# Altium PCB RF315Mhz.PcbDoc (part 2 of 2)
Units mm, origin at the board's own origin, x right, y up, seen from the top; angles counter-clockwise.
Board outline 104 x 96 mm, 2 copper layers (Top Layer, Bottom Layer); 125 components, 20 nets, 503 pads, 66 vias.
Unrouted connection lines stored in the file: 1.
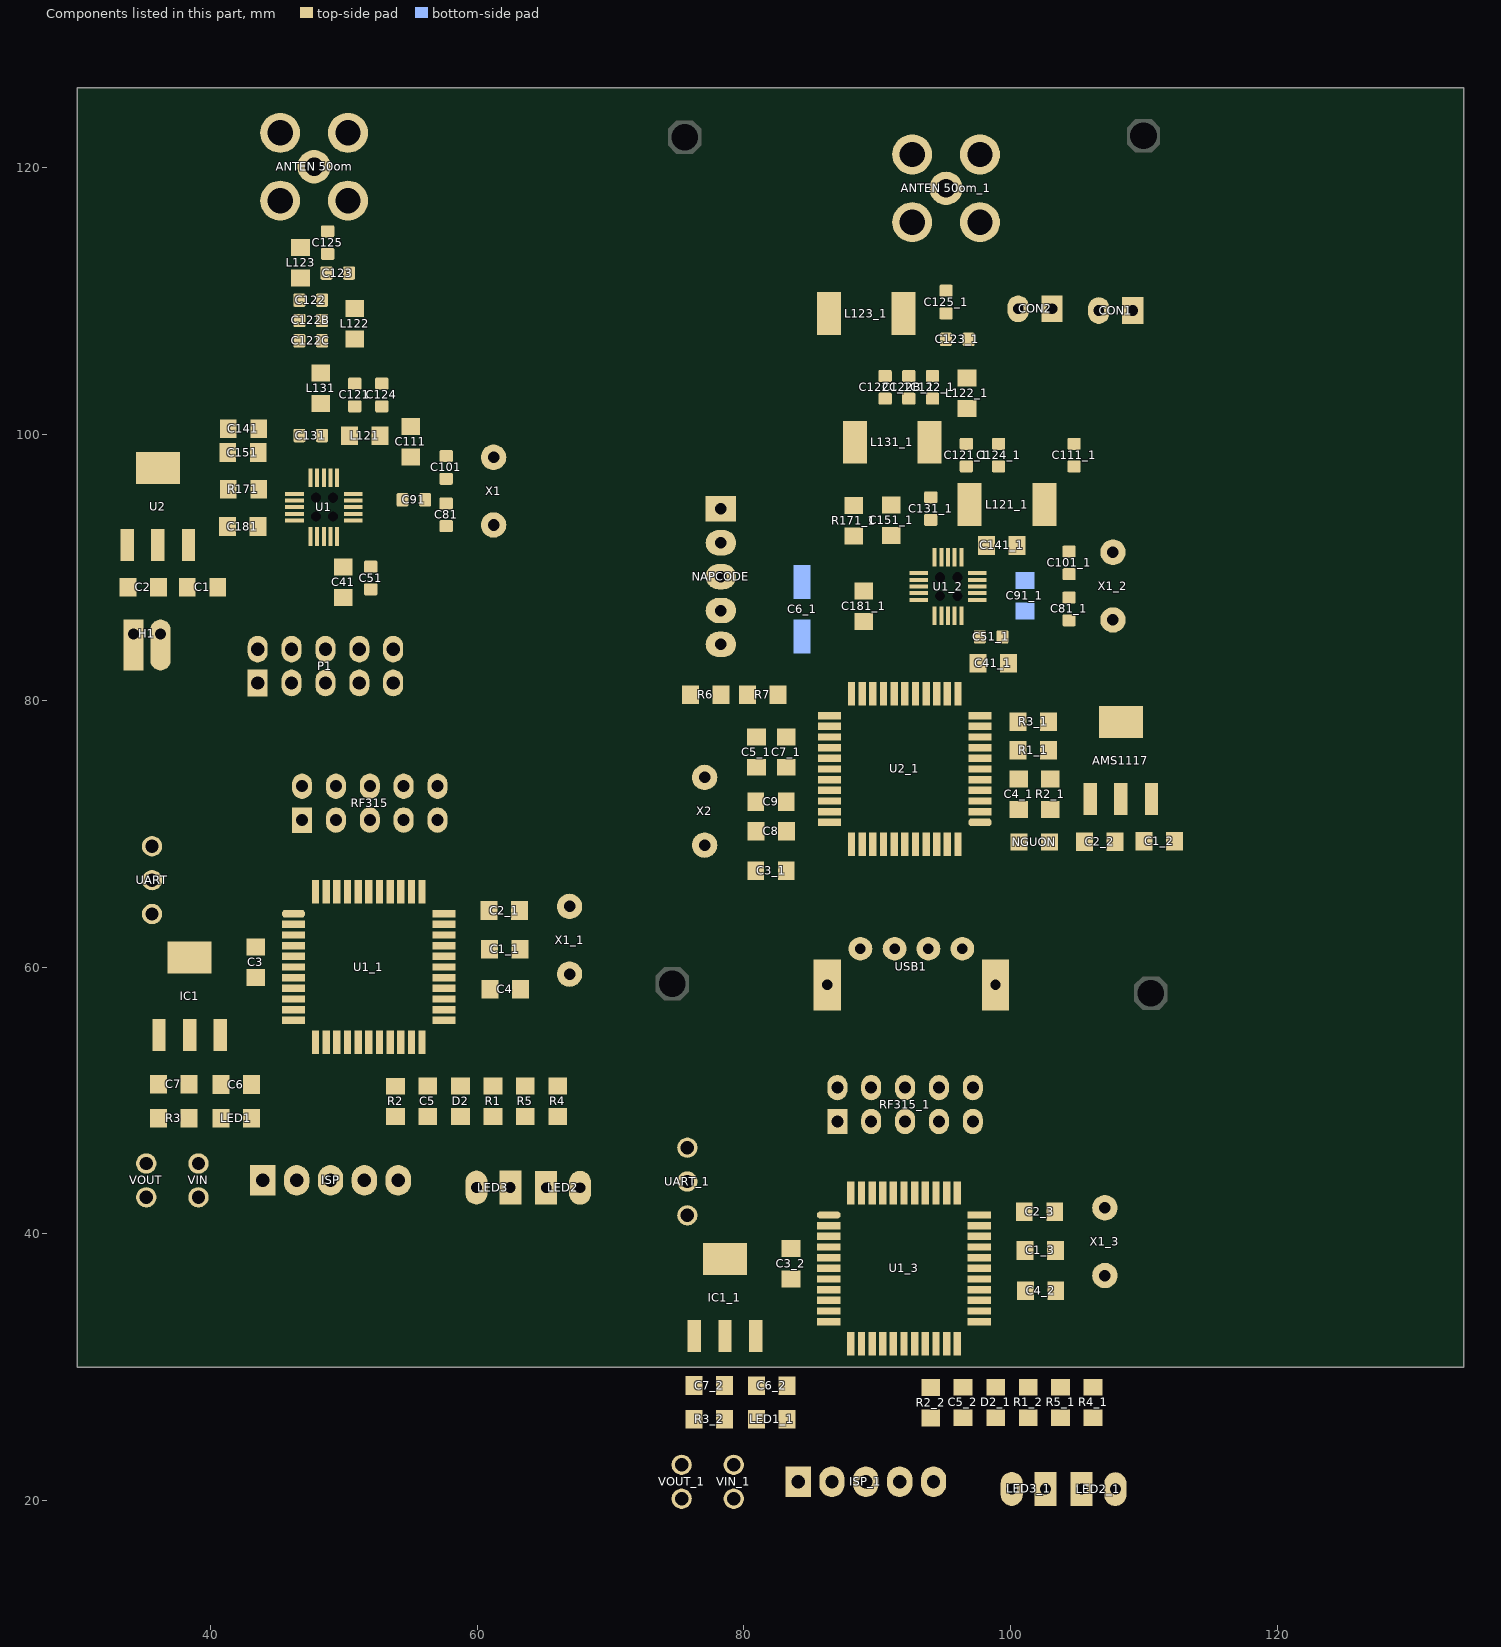
[diagram p2: the components of this part, seen from the top]

## Via types
v1: diameter 1.27, hole 0.711, Top Layer to Bottom Layer, 52 vias
v2: diameter 1, hole 0.7, Top Layer to Bottom Layer, 5 vias
v3: diameter 1.1, hole 0.7, Top Layer to Bottom Layer, 3 vias
v4: diameter 1.1, hole 0.711, Top Layer to Bottom Layer, 2 vias
v5: diameter 1, hole 0.6, Top Layer to Bottom Layer, 2 vias
v6: diameter 1.143, hole 0.711, Top Layer to Bottom Layer, 1 vias
v7: diameter 1, hole 0.711, Top Layer to Bottom Layer, 1 vias

## Nets (pads, with @x,y where several pads share a name; then routed paths per layer and width w, separated by ;. In a path a pad name is that pad's centre, name@x,y a point inside that pad or via, vN(x,y) a via of type N, cw(c..) or ccw(c..) an arc to the next point about the centre after c; other vN are vias at no path point) (continued)
copper on no net: | length 1810
  Top Layer w0.025: 57.545,118.276 57.622,118.276 ; 57.545,118.302 57.622,118.302 ; 57.545,118.327 57.622,118.327 ; 57.545,118.352 57.622,118.352 ; 57.545,118.378 57.622,118.378 ; 57.545,118.403 57.622,118.403 ; 57.545,118.429 57.622,118.429 ; 57.545,118.454 57.622,118.454 ; 57.545,118.479 57.622,118.479 ; 57.545,118.505 57.622,118.505 ; 57.545,118.53 57.622,118.53 ; 57.545,118.556 57.622,118.556 ; 57.545,118.581 57.622,118.581 ; 57.545,118.606 57.622,118.606 ; 57.545,118.632 57.622,118.632 ; 57.545,118.657 57.622,118.657 ; 57.545,118.683 57.622,118.683 ; 57.545,118.708 57.622,118.708 ; 57.545,118.733 57.622,118.733 ; 57.545,118.759 57.622,118.759 ; 57.545,118.784 57.622,118.784 ; 57.545,118.81 57.622,118.81 ; 57.545,118.835 57.622,118.835 ; 57.545,118.86 57.622,118.86 ; 57.545,118.886 57.622,118.886 ; 57.545,118.911 57.622,118.911 ; 57.545,118.937 57.622,118.937 ; 57.545,118.962 57.622,118.962 ; 57.545,118.987 57.622,118.987 ; 57.545,119.013 57.622,119.013 ; 57.545,119.038 57.622,119.038 ; 57.545,119.064 57.622,119.064 ; 57.545,119.089 57.622,119.089 ; 57.545,119.114 57.622,119.114 ; 57.545,119.14 57.622,119.14 ; 57.545,119.165 57.622,119.165 ; 57.545,119.191 57.622,119.191 ; 57.545,119.216 57.622,119.216 ; 57.545,119.241 57.622,119.241 ; 57.545,119.267 57.622,119.267 ; 57.545,119.292 57.622,119.292 ; 57.545,119.318 57.622,119.318 ; 57.545,119.343 57.622,119.343 ; 57.545,119.368 57.622,119.368 ; 57.545,119.394 57.622,119.394 ; 57.545,119.419 57.622,119.419 ; 57.545,119.445 57.622,119.445 ; 57.545,119.47 57.622,119.47 ; 57.545,119.495 57.622,119.495 ; 57.545,119.521 57.622,119.521 ; 57.545,119.546 57.622,119.546 ; 57.545,119.572 57.622,119.572 ; 57.545,119.597 57.622,119.597 ; 57.545,119.622 57.622,119.622 ; 57.545,119.648 57.622,119.648 ; 57.545,119.673 57.622,119.673 ; 57.545,119.699 57.622,119.699 ; 57.545,119.724 57.622,119.724 ; 57.545,119.749 57.622,119.749 ; 57.545,119.775 57.622,119.775 ; 57.545,119.8 57.622,119.8 ; 57.545,119.826 57.622,119.826 ; 57.545,119.851 57.622,119.851 ; 57.545,119.876 57.622,119.876 ; 57.545,119.902 57.622,119.902 ; 57.545,119.927 57.622,119.927 ; 57.545,119.953 57.622,119.953 ; 57.545,119.978 57.622,119.978 ; 57.545,120.003 57.622,120.003 ; 57.545,120.029 57.622,120.029 ; 57.545,120.054 57.622,120.054 ; 57.545,120.08 57.622,120.08 ; 57.545,120.105 57.622,120.105 ; 57.545,120.13 57.622,120.13 ; 57.545,120.156 57.622,120.156 ; 57.545,120.181 57.622,120.181 ; 57.545,120.207 57.622,120.207 ; 57.545,120.232 57.622,120.232 ; 57.545,120.257 57.622,120.257 ; 57.545,120.283 57.622,120.283 ; 57.545,120.308 57.622,120.308 ; 57.545,120.334 57.622,120.334 ; 57.545,120.359 57.622,120.359 ; 57.545,120.384 57.622,120.384 ; 57.545,120.41 57.622,120.41 ; 57.545,120.435 57.622,120.435 ; 57.545,120.461 57.622,120.461 ; 57.545,120.486 57.622,120.486 ; 57.545,120.511 57.622,120.511 ; 57.545,120.537 57.622,120.537 ; 57.545,120.562 57.622,120.562 ; 57.545,120.588 57.622,120.588 ; 57.545,120.613 57.622,120.613 ; 57.545,120.638 57.622,120.638 ; 57.545,120.664 57.622,120.664 ; 57.545,120.689 57.622,120.689 ; 57.545,120.715 57.622,120.715 ; 57.545,120.74 57.622,120.74 ; 57.545,120.765 57.622,120.765 ; 57.545,120.791 57.622,120.791 ; 57.545,120.816 57.622,120.816 ; 57.545,120.842 57.622,120.842 ; 57.545,120.867 57.622,120.867 ; 57.545,120.892 57.622,120.892 ; 57.545,120.918 57.622,120.918 ; 57.545,120.943 57.622,120.943 ; 57.545,120.969 57.622,120.969 ; 57.545,120.994 57.622,120.994 ; 57.545,121.019 57.622,121.019 ; 57.545,121.045 57.622,121.045 ; 57.545,121.07 57.622,121.07 ; 57.545,121.096 57.622,121.096 ; 57.545,121.121 57.622,121.121 ; 57.545,121.146 57.622,121.146 ; 57.545,121.172 57.622,121.172 ; 57.545,121.197 57.622,121.197 ; 57.545,121.223 57.622,121.223 ; 57.545,121.248 57.622,121.248 ; 57.545,121.273 57.622,121.273 ; 57.545,121.299 57.622,121.299 ; 57.545,121.324 57.622,121.324 ; 57.545,121.35 57.622,121.35 ; 57.545,121.375 57.622,121.375 ; 57.545,121.4 57.622,121.4 ; 57.545,121.426 57.622,121.426 ; 57.545,121.451 57.622,121.451 ; 57.545,121.477 57.622,121.477 ; 57.545,121.502 57.622,121.502 ; 57.545,121.527 57.622,121.527 ; 57.545,121.553 57.622,121.553 ; 57.545,121.578 57.622,121.578 ; 57.545,121.604 57.622,121.604 ; 57.545,121.629 57.622,121.629 ; 57.545,121.654 57.622,121.654 ; 57.545,121.68 57.622,121.68 ; 57.545,121.705 57.622,121.705 ; 57.545,121.731 57.622,121.731 ; 57.545,121.756 57.622,121.756 ; 57.545,121.781 57.622,121.781 ; 57.545,121.807 57.622,121.807 ; 57.545,121.832 57.622,121.832 ; 57.545,121.858 57.622,121.858 ; 57.545,121.883 57.622,121.883 ; 57.545,121.908 57.622,121.908 ; 57.545,121.934 57.622,121.934 ; 57.545,121.959 57.622,121.959 ; 57.545,121.985 57.647,121.985 ; 57.571,118.175 57.672,118.175 ; 57.571,118.2 57.647,118.2 ; 57.571,118.225 57.647,118.225 ; 57.571,118.251 57.647,118.251 ; 57.571,122.01 57.647,122.01 ; 57.571,122.035 57.647,122.035 ; 57.571,122.061 57.672,122.061 ; 57.596,118.124 57.672,118.124 ; 57.596,118.149 57.672,118.149 ; 57.596,122.086 57.672,122.086 ; 57.596,122.112 57.672,122.112 ; 57.596,122.137 57.698,122.137 ; 57.622,118.073 57.698,118.073 ; 57.622,118.098 57.698,118.098 ; 57.622,122.162 57.698,122.162 ; 57.622,122.188 57.723,122.188 ; 57.647,118.022 57.749,118.022 ; 57.647,118.048 57.723,118.048 ; 57.647,122.213 57.723,122.213 ; 57.647,122.239 57.749,122.239 ; 57.672,117.971 57.774,117.971 ; 57.672,117.997 57.749,117.997 ; 57.672,122.264 57.774,122.264 ; 57.698,117.946 57.799,117.946 ; 57.698,122.289 57.799,122.289 ; 57.698,122.315 57.799,122.315 ; 57.723,117.895 57.825,117.895 ; 57.723,117.921 57.825,117.921 ; 57.723,122.34 57.825,122.34 ; 57.749,117.87 57.85,117.87 ; 57.749,122.366 57.85,122.366 ; 57.774,117.844 57.901,117.844 ; 57.774,122.391 57.876,122.391 ; 57.799,117.819 57.926,117.819 ; 57.799,122.416 57.926,122.416 ; 57.825,117.794 57.952,117.794 ; 57.825,122.442 57.952,122.442 ; 57.85,122.467 57.977,122.467 ; 57.876,117.768 58.003,117.768 ; 57.876,122.493 58.028,122.493 ; 57.901,117.743 58.028,117.743 ; 57.926,117.717 58.104,117.717 ; 57.926,122.518 58.079,122.518 ; 57.952,122.543 58.155,122.543 ; 57.977,117.692 58.155,117.692 ; 57.977,121.908 58.536,121.908 ; 57.977,121.934 58.511,121.934 ; 57.977,121.959 58.485,121.959 ; 57.977,121.985 58.485,121.985 ; 57.977,122.01 58.485,122.01 ; 57.977,122.035 58.485,122.035 ; 57.977,122.061 58.46,122.061 ; 58.003,121.858 58.587,121.858 ; 58.003,121.883 58.561,121.883 ; 58.003,122.086 58.46,122.086 ; 58.003,122.112 58.434,122.112 ; 58.003,122.569 58.231,122.569 ; 58.028,117.667 58.257,117.667 ; 58.028,121.807 58.638,121.807 ; 58.028,121.832 58.612,121.832 ; 58.028,122.137 58.434,122.137 ; 58.053,118.098 58.13,118.098 ; 58.053,118.124 58.282,118.124 ; 58.053,118.149 58.434,118.149 ; 58.053,118.175 58.587,118.175 ; 58.053,118.2 58.612,118.2 ; 58.053,121.781 58.663,121.781 ; 58.053,122.162 58.409,122.162 ; 58.053,122.594 62.092,122.594 ; 58.079,117.641 62.092,117.641 ; 58.079,118.225 58.638,118.225 ; 58.079,118.251 58.663,118.251 ; 58.079,118.276 58.688,118.276 ; 58.079,118.302 58.714,118.302 ; 58.079,118.327 58.739,118.327 ; 58.079,118.352 58.765,118.352 ; 58.079,122.188 58.358,122.188 ; 58.104,118.378 58.79,118.378 ; 58.104,118.403 58.815,118.403 ; 58.104,118.429 58.841,118.429 ; 58.104,118.454 58.866,118.454 ; 58.104,118.479 58.892,118.479 ; 58.104,118.505 58.917,118.505 ; 58.104,121.756 58.688,121.756 ; 58.13,118.53 58.942,118.53 ; 58.13,118.556 58.968,118.556 ; 58.13,118.581 58.993,118.581 ; 58.13,118.606 59.019,118.606 ; 58.13,122.213 58.307,122.213 ; 58.13,122.62 62.041,122.62 ; 58.155,117.616 62.016,117.616 ; 58.155,118.632 59.044,118.632 ; 58.155,121.731 58.714,121.731 ; 58.18,118.657 59.069,118.657 ; 58.206,118.683 59.095,118.683 ; 58.206,122.645 61.94,122.645 ; 58.231,117.59 61.914,117.59 ; 58.231,118.708 59.12,118.708 ; 58.231,120.486 58.282,120.486 ; 58.257,118.733 59.146,118.733 ; 58.257,120.511 58.358,120.511 ; 58.257,121.705 58.739,121.705 ; 58.282,118.759 59.171,118.759 ; 58.282,120.537 58.434,120.537 ; 58.282,121.68 58.765,121.68 ; 58.307,118.784 59.196,118.784 ; 58.307,120.562 58.511,120.562 ; 58.307,121.654 58.79,121.654 ; 58.333,118.81 59.222,118.81 ; 58.333,120.588 58.587,120.588 ; 58.333,121.629 58.815,121.629 ; 58.358,118.835 59.247,118.835 ; 58.358,120.613 58.638,120.613 ; 58.358,121.604 58.841,121.604 ; 58.384,118.86 59.273,118.86 ; 58.384,120.638 58.714,120.638 ; 58.384,121.578 58.866,121.578 ; 58.409,118.886 59.298,118.886 ; 58.409,120.664 58.79,120.664 ; 58.409,121.553 58.892,121.553 ; 58.434,118.911 59.323,118.911 ; 58.434,120.689 58.815,120.689 ; 58.434,121.527 58.917,121.527 ; 58.46,118.937 59.349,118.937 ; 58.46,120.715 58.841,120.715 ; 58.46,121.502 58.942,121.502 ; 58.485,118.962 59.374,118.962 ; 58.485,120.74 58.866,120.74 ; 58.485,121.477 58.968,121.477 ; 58.511,118.987 59.4,118.987 ; 58.511,120.765 58.892,120.765 ; 58.511,121.451 58.993,121.451 ; 58.536,119.013 59.425,119.013 ; 58.536,120.791 58.917,120.791 ; 58.536,121.426 59.019,121.426 ; 58.561,119.038 59.45,119.038 ; 58.561,120.816 59.831,120.816 ; 58.561,121.4 59.044,121.4 ; 58.587,119.064 59.476,119.064 ; 58.587,120.842 59.806,120.842 ; 58.587,121.375 59.069,121.375 ; 58.612,119.089 59.501,119.089 ; 58.612,120.867 59.781,120.867 ; 58.612,121.35 59.476,121.35 ; 58.638,119.114 59.527,119.114 ; 58.638,120.892 59.755,120.892 ; 58.638,121.324 59.45,121.324 ; 58.663,119.14 59.552,119.14 ; 58.663,120.918 59.73,120.918 ; 58.663,121.299 59.425,121.299 ; 58.688,119.165 59.577,119.165 ; 58.688,120.943 59.704,120.943 ; 58.688,121.273 59.4,121.273 ; 58.714,119.191 59.603,119.191 ; 58.714,120.969 59.679,120.969 ; 58.714,121.248 59.4,121.248 ; 58.739,119.216 59.628,119.216 ; 58.739,120.994 59.654,120.994 ; 58.739,121.223 59.425,121.223 ; 58.765,119.241 59.654,119.241 ; 58.765,121.019 59.628,121.019 ; 58.765,121.197 59.45,121.197 ; 58.79,119.267 59.679,119.267 ; 58.79,121.045 59.603,121.045 ; 58.79,121.172 59.476,121.172 ; 58.815,119.292 59.704,119.292 ; 58.815,121.07 59.577,121.07 ; 58.815,121.146 59.501,121.146 ; 58.841,119.318 59.73,119.318 ; 58.841,121.096 59.552,121.096 ; 58.841,121.121 59.527,121.121 ; 58.866,119.343 59.755,119.343 ; 58.892,119.368 59.781,119.368 ; 58.917,119.394 59.806,119.394 ; 58.942,119.419 59.831,119.419 ; 58.968,119.445 59.857,119.445 ; 58.968,120.791 59.857,120.791 ; 58.993,119.47 59.882,119.47 ; 58.993,120.765 59.882,120.765 ; 59.019,119.495 59.908,119.495 ; 59.019,120.74 59.908,120.74 ; 59.044,119.521 59.933,119.521 ; 59.044,120.715 59.933,120.715 ; 59.069,119.546 59.958,119.546 ; 59.069,120.689 59.958,120.689 ; 59.095,119.572 59.984,119.572 ; 59.095,120.664 59.984,120.664 ; 59.12,119.597 60.009,119.597 ; 59.12,120.638 60.009,120.638 ; 59.12,121.375 59.501,121.375 ; 59.146,119.622 60.035,119.622 ; 59.146,120.613 60.035,120.613 ; 59.146,121.4 59.527,121.4 ; 59.171,119.648 60.06,119.648 ; 59.171,120.588 60.06,120.588 ; 59.171,121.426 59.552,121.426 ; 59.196,119.673 60.974,119.673 ; 59.196,120.562 60.974,120.562 ; 59.196,121.451 59.552,121.451 ; 59.222,119.699 60.949,119.699 ; 59.222,120.537 60.949,120.537 ; 59.222,121.477 59.552,121.477 ; 59.247,119.724 60.924,119.724 ; 59.247,120.511 60.924,120.511 ; 59.247,121.502 59.577,121.502 ; 59.273,119.749 60.898,119.749 ; 59.273,120.486 60.898,120.486 ; 59.273,121.527 59.577,121.527 ; 59.298,119.775 60.873,119.775 ; 59.298,120.461 60.873,120.461 ; 59.298,121.553 59.577,121.553 ; 59.323,119.8 60.847,119.8 ; 59.323,120.435 60.847,120.435 ; 59.323,121.578 59.603,121.578 ; 59.349,119.826 60.822,119.826 ; 59.349,120.41 60.822,120.41 ; 59.349,121.604 59.603,121.604 ; 59.374,119.851 60.797,119.851 ; 59.374,120.384 60.797,120.384 ; 59.374,121.629 59.628,121.629 ; 59.4,119.876 60.771,119.876 ; 59.4,120.359 60.771,120.359 ; 59.4,121.654 59.628,121.654 ; 59.425,119.902 60.746,119.902 ; 59.425,120.334 60.746,120.334 ; 59.425,121.68 59.628,121.68 ; 59.45,119.927 60.72,119.927 ; 59.45,120.308 60.72,120.308 ; 59.45,121.705 59.654,121.705 ; 59.476,119.953 60.695,119.953 ; 59.476,120.283 60.695,120.283 ; 59.476,121.731 59.654,121.731 ; 59.501,119.978 60.67,119.978 ; 59.501,120.257 60.67,120.257 ; 59.501,121.756 59.654,121.756 ; 59.527,120.003 60.644,120.003 ; 59.527,120.232 60.644,120.232 ; 59.527,121.781 59.679,121.781 ; 59.552,120.029 60.619,120.029 ; 59.552,120.207 60.619,120.207 ; 59.552,121.807 59.679,121.807 ; 59.577,120.054 60.593,120.054 ; 59.577,120.181 60.593,120.181 ; 59.577,121.832 59.679,121.832 ; 59.603,120.08 60.568,120.08 ; 59.603,120.156 60.568,120.156 ; 59.603,121.858 59.704,121.858 ; 59.628,120.105 60.543,120.105 ; 59.628,120.13 60.543,120.13 ; 59.628,121.883 59.704,121.883 ; 59.654,121.908 59.704,121.908 ; 59.679,121.934 59.73,121.934 ; 59.704,121.959 59.73,121.959 ; 60.111,119.648 61,119.648 ; 60.111,120.588 61,120.588 ; 60.136,119.622 61.025,119.622 ; 60.136,120.613 61.025,120.613 ; 60.162,119.597 61.051,119.597 ; 60.162,120.638 61.051,120.638 ; 60.187,119.572 61.076,119.572 ; 60.187,120.664 61.076,120.664 ; 60.212,119.546 61.101,119.546 ; 60.212,120.689 61.101,120.689 ; 60.238,119.521 61.127,119.521 ; 60.238,120.715 61.127,120.715 ; 60.263,119.495 61.152,119.495 ; 60.263,120.74 61.152,120.74 ; 60.289,119.47 61.178,119.47 ; 60.289,120.765 61.178,120.765 ; 60.314,119.445 61.203,119.445 ; 60.314,120.791 61.203,120.791 ; 60.339,119.419 61.228,119.419 ; 60.339,120.816 61.609,120.816 ; 60.365,119.394 61.254,119.394 ; 60.365,120.842 61.584,120.842 ; 60.39,119.368 61.279,119.368 ; 60.39,120.867 61.559,120.867 ; 60.416,119.343 61.305,119.343 ; 60.416,120.892 61.533,120.892 ; 60.441,119.318 61.33,119.318 ; 60.441,120.918 61.508,120.918 ; 60.441,121.908 60.517,121.908 ; 60.441,121.934 60.492,121.934 ; 60.441,121.959 60.466,121.959 ; 60.466,119.292 61.355,119.292 ; 60.466,120.943 61.482,120.943 ; 60.466,121.858 60.568,121.858 ; 60.466,121.883 60.543,121.883 ; 60.492,119.267 61.381,119.267 ; 60.492,120.969 61.457,120.969 ; 60.492,121.781 60.644,121.781 ; 60.492,121.807 60.619,121.807 ; 60.492,121.832 60.593,121.832 ; 60.517,119.241 61.406,119.241 ; 60.517,120.994 61.432,120.994 ; 60.517,121.705 60.72,121.705 ; 60.517,121.731 60.695,121.731 ; 60.517,121.756 60.67,121.756 ; 60.543,119.216 61.432,119.216 ; 60.543,121.019 61.406,121.019 ; 60.543,121.629 60.797,121.629 ; 60.543,121.654 60.771,121.654 ; 60.543,121.68 60.746,121.68 ; 60.568,119.191 61.457,119.191 ; 60.568,121.045 61.381,121.045 ; 60.568,121.553 60.873,121.553 ; 60.568,121.578 60.847,121.578 ; 60.568,121.604 60.822,121.604 ; 60.593,119.165 61.482,119.165 ; 60.593,121.07 61.355,121.07 ; 60.593,121.477 60.949,121.477 ; 60.593,121.502 60.924,121.502 ; 60.593,121.527 60.898,121.527 ; 60.619,119.14 61.508,119.14 ; 60.619,121.096 61.33,121.096 ; 60.619,121.4 61.025,121.4 ; 60.619,121.426 61,121.426 ; 60.619,121.451 60.974,121.451 ; 60.644,119.114 61.533,119.114 ; 60.644,121.121 61.33,121.121 ; 60.644,121.375 61.051,121.375 ; 60.67,119.089 61.559,119.089 ; 60.67,121.146 61.355,121.146 ; 60.67,121.35 61.559,121.35 ; 60.695,119.064 61.584,119.064 ; 60.695,121.172 61.381,121.172 ; 60.695,121.324 61.533,121.324 ; 60.72,119.038 61.609,119.038 ; 60.72,121.197 61.406,121.197 ; 60.72,121.299 61.508,121.299 ; 60.746,119.013 61.635,119.013 ; 60.746,121.223 61.432,121.223 ; 60.746,121.273 61.482,121.273 ; 60.771,118.987 61.66,118.987 ; 60.771,121.248 61.457,121.248 ; 60.797,118.962 61.686,118.962 ; 60.822,118.937 61.711,118.937 ; 60.847,118.911 61.736,118.911 ; 60.873,118.886 61.762,118.886 ; 60.898,118.86 61.787,118.86 ; 60.924,118.835 61.813,118.835 ; 60.949,118.81 61.838,118.81 ; 60.974,118.784 61.863,118.784 ; 61,118.759 61.889,118.759 ; 61.025,118.733 61.914,118.733 ; 61.051,118.708 61.94,118.708 ; 61.076,118.683 61.965,118.683 ; 61.101,118.657 61.99,118.657 ; 61.101,121.375 61.584,121.375 ; 61.127,118.632 62.016,118.632 ; 61.127,121.4 61.609,121.4 ; 61.152,118.606 62.041,118.606 ; 61.152,121.426 61.635,121.426 ; 61.178,118.581 62.041,118.581 ; 61.178,121.451 61.66,121.451 ; 61.203,118.556 62.041,118.556 ; 61.203,121.477 61.686,121.477 ; 61.228,118.53 62.041,118.53 ; 61.228,120.791 61.635,120.791 ; 61.228,121.502 61.711,121.502 ; 61.254,118.505 62.041,118.505 ; 61.254,120.765 61.66,120.765 ; 61.254,121.527 61.736,121.527 ; 61.279,118.479 62.067,118.479 ; 61.279,120.74 61.686,120.74 ; 61.279,121.553 61.762,121.553 ; 61.305,118.454 62.067,118.454 ; 61.305,120.715 61.711,120.715 ; 61.305,121.578 61.787,121.578 ; 61.33,118.429 62.067,118.429 ; 61.33,120.689 61.736,120.689 ; 61.33,121.604 61.813,121.604 ; 61.355,118.403 62.067,118.403 ; 61.355,121.629 61.838,121.629 ; 61.381,118.378 62.067,118.378 ; 61.381,120.664 61.762,120.664 ; 61.381,121.654 61.863,121.654 ; 61.406,118.352 62.067,118.352 ; 61.406,121.68 61.889,121.68 ; 61.432,118.327 62.092,118.327 ; 61.432,120.638 61.787,120.638 ; 61.432,121.705 61.914,121.705 ; 61.457,118.302 62.092,118.302 ; 61.457,121.731 62.016,121.731 ; 61.482,118.276 62.092,118.276 ; 61.482,121.756 62.067,121.756 ; 61.508,118.251 62.092,118.251 ; 61.508,120.613 61.813,120.613 ; 61.508,121.781 62.092,121.781 ; 61.533,118.225 62.092,118.225 ; 61.533,121.807 62.117,121.807 ; 61.559,118.2 62.092,118.2 ; 61.559,121.832 62.143,121.832 ; 61.584,118.175 62.117,118.175 ; 61.584,120.588 61.838,120.588 ; 61.584,121.858 62.168,121.858 ; 61.609,121.883 62.168,121.883 ; 61.635,121.908 62.194,121.908 ; 61.66,120.562 61.863,120.562 ; 61.66,121.934 62.194,121.934 ; 61.686,121.959 62.194,121.959 ; 61.686,121.985 62.194,121.985 ; 61.686,122.01 62.194,122.01 ; 61.686,122.035 62.194,122.035 ; 61.686,122.061 62.168,122.061 ; 61.711,118.149 62.117,118.149 ; 61.711,122.086 62.168,122.086 ; 61.711,122.112 62.143,122.112 ; 61.736,120.537 61.889,120.537 ; 61.736,122.137 62.143,122.137 ; 61.762,122.162 62.117,122.162 ; 61.787,122.188 62.067,122.188 ; 61.813,120.511 61.914,120.511 ; 61.838,122.213 62.016,122.213 ; 61.863,118.124 62.117,118.124 ; 61.889,120.486 61.914,120.486 ; 61.914,117.667 62.143,117.667 ; 61.94,122.569 62.168,122.569 ; 62.016,117.692 62.194,117.692 ; 62.016,118.098 62.117,118.098 ; 62.016,122.543 62.194,122.543 ; 62.067,117.717 62.244,117.717 ; 62.092,122.518 62.244,122.518 ; 62.117,117.743 62.27,117.743 ; 62.143,122.493 62.27,122.493 ; 62.168,117.768 62.295,117.768 ; 62.168,122.467 62.321,122.467 ; 62.219,117.794 62.321,117.794 ; 62.219,122.442 62.346,122.442 ; 62.244,117.819 62.371,117.819 ; 62.244,122.416 62.371,122.416 ; 62.27,117.844 62.397,117.844 ; 62.27,122.391 62.397,122.391 ; 62.295,117.87 62.397,117.87 ; 62.321,117.895 62.422,117.895 ; 62.321,122.366 62.422,122.366 ; 62.346,117.921 62.448,117.921 ; 62.346,122.315 62.448,122.315 ; 62.346,122.34 62.448,122.34 ; 62.371,117.946 62.473,117.946 ; 62.371,122.289 62.473,122.289 ; 62.397,117.971 62.498,117.971 ; 62.397,122.264 62.498,122.264 ; 62.422,117.997 62.498,117.997 ; 62.422,118.022 62.524,118.022 ; 62.422,122.213 62.524,122.213 ; 62.422,122.239 62.498,122.239 ; 62.448,118.048 62.524,118.048 ; 62.448,118.073 62.549,118.073 ; 62.448,122.188 62.524,122.188 ; 62.473,118.098 62.549,118.098 ; 62.473,118.124 62.575,118.124 ; 62.473,122.112 62.575,122.112 ; 62.473,122.137 62.549,122.137 ; 62.473,122.162 62.549,122.162 ; 62.498,118.149 62.575,118.149 ; 62.498,118.175 62.575,118.175 ; 62.498,122.061 62.575,122.061 ; 62.498,122.086 62.575,122.086 ; 62.524,118.2 62.6,118.2 ; 62.524,118.225 62.6,118.225 ; 62.524,118.251 62.6,118.251 ; 62.524,118.276 62.6,118.276 ; 62.524,121.959 62.625,121.959 ; 62.524,121.985 62.6,121.985 ; 62.524,122.01 62.6,122.01 ; 62.524,122.035 62.6,122.035 ; 62.549,118.302 62.625,118.302 ; 62.549,118.327 62.625,118.327 ; 62.549,118.352 62.625,118.352 ; 62.549,118.378 62.625,118.378 ; 62.549,118.403 62.625,118.403 ; 62.549,118.429 62.625,118.429 ; 62.549,118.454 62.625,118.454 ; 62.549,118.479 62.625,118.479 ; 62.549,118.505 62.625,118.505 ; 62.549,118.53 62.625,118.53 ; 62.549,118.556 62.625,118.556 ; 62.549,118.581 62.625,118.581 ; 62.549,118.606 62.625,118.606 ; 62.549,118.632 62.625,118.632 ; 62.549,118.657 62.625,118.657 ; 62.549,118.683 62.625,118.683 ; 62.549,118.708 62.625,118.708 ; 62.549,118.733 62.625,118.733 ; 62.549,118.759 62.625,118.759 ; 62.549,118.784 62.625,118.784 ; 62.549,118.81 62.625,118.81 ; 62.549,118.835 62.625,118.835 ; 62.549,118.86 62.625,118.86 ; 62.549,118.886 62.625,118.886 ; 62.549,118.911 62.625,118.911 ; 62.549,118.937 62.625,118.937 ; 62.549,118.962 62.625,118.962 ; 62.549,118.987 62.625,118.987 ; 62.549,119.013 62.625,119.013 ; 62.549,119.038 62.625,119.038 ; 62.549,119.064 62.625,119.064 ; 62.549,119.089 62.625,119.089 ; 62.549,119.114 62.625,119.114 ; 62.549,119.14 62.625,119.14 ; 62.549,119.165 62.625,119.165 ; 62.549,119.191 62.625,119.191 ; 62.549,119.216 62.625,119.216 ; 62.549,119.241 62.625,119.241 ; 62.549,119.267 62.625,119.267 ; 62.549,119.292 62.625,119.292 ; 62.549,119.318 62.625,119.318 ; 62.549,119.343 62.625,119.343 ; 62.549,119.368 62.625,119.368 ; 62.549,119.394 62.625,119.394 ; 62.549,119.419 62.625,119.419 ; 62.549,119.445 62.625,119.445 ; 62.549,119.47 62.625,119.47 ; 62.549,119.495 62.625,119.495 ; 62.549,119.521 62.625,119.521 ; 62.549,119.546 62.625,119.546 ; 62.549,119.572 62.625,119.572 ; 62.549,119.597 62.625,119.597 ; 62.549,119.622 62.625,119.622 ; 62.549,119.648 62.625,119.648 ; 62.549,119.673 62.625,119.673 ; 62.549,119.699 62.625,119.699 ; 62.549,119.724 62.625,119.724 ; 62.549,119.749 62.625,119.749 ; 62.549,119.775 62.625,119.775 ; 62.549,119.8 62.625,119.8 ; 62.549,119.826 62.625,119.826 ; 62.549,119.851 62.625,119.851 ; 62.549,119.876 62.625,119.876 ; 62.549,119.902 62.625,119.902 ; 62.549,119.927 62.625,119.927 ; 62.549,119.953 62.625,119.953 ; 62.549,119.978 62.625,119.978 ; 62.549,120.003 62.625,120.003 ; 62.549,120.029 62.625,120.029 ; 62.549,120.054 62.625,120.054 ; 62.549,120.08 62.625,120.08 ; 62.549,120.105 62.625,120.105 ; 62.549,120.13 62.625,120.13 ; 62.549,120.156 62.625,120.156 ; 62.549,120.181 62.625,120.181 ; 62.549,120.207 62.625,120.207 ; 62.549,120.232 62.625,120.232 ; 62.549,120.257 62.625,120.257 ; 62.549,120.283 62.625,120.283 ; 62.549,120.308 62.625,120.308 ; 62.549,120.334 62.625,120.334 ; 62.549,120.359 62.625,120.359 ; 62.549,120.384 62.625,120.384 ; 62.549,120.41 62.625,120.41 ; 62.549,120.435 62.625,120.435 ; 62.549,120.461 62.625,120.461 ; 62.549,120.486 62.625,120.486 ; 62.549,120.511 62.625,120.511 ; 62.549,120.537 62.625,120.537 ; 62.549,120.562 62.625,120.562 ; 62.549,120.588 62.625,120.588 ; 62.549,120.613 62.625,120.613 ; 62.549,120.638 62.625,120.638 ; 62.549,120.664 62.625,120.664 ; 62.549,120.689 62.625,120.689 ; 62.549,120.715 62.625,120.715 ; 62.549,120.74 62.625,120.74 ; 62.549,120.765 62.625,120.765 ; 62.549,120.791 62.625,120.791 ; 62.549,120.816 62.625,120.816 ; 62.549,120.842 62.625,120.842 ; 62.549,120.867 62.625,120.867 ; 62.549,120.892 62.625,120.892 ; 62.549,120.918 62.625,120.918 ; 62.549,120.943 62.625,120.943 ; 62.549,120.969 62.625,120.969 ; 62.549,120.994 62.625,120.994 ; 62.549,121.019 62.625,121.019 ; 62.549,121.045 62.625,121.045 ; 62.549,121.07 62.625,121.07 ; 62.549,121.096 62.625,121.096 ; 62.549,121.121 62.625,121.121 ; 62.549,121.146 62.625,121.146 ; 62.549,121.172 62.625,121.172 ; 62.549,121.197 62.625,121.197 ; 62.549,121.223 62.625,121.223 ; 62.549,121.248 62.625,121.248 ; 62.549,121.273 62.625,121.273 ; 62.549,121.299 62.625,121.299 ; 62.549,121.324 62.625,121.324 ; 62.549,121.35 62.625,121.35 ; 62.549,121.375 62.625,121.375 ; 62.549,121.4 62.625,121.4 ; 62.549,121.426 62.625,121.426 ; 62.549,121.451 62.625,121.451 ; 62.549,121.477 62.625,121.477 ; 62.549,121.502 62.625,121.502 ; 62.549,121.527 62.625,121.527 ; 62.549,121.553 62.625,121.553 ; 62.549,121.578 62.625,121.578 ; 62.549,121.604 62.625,121.604 ; 62.549,121.629 62.625,121.629 ; 62.549,121.654 62.625,121.654 ; 62.549,121.68 62.625,121.68 ; 62.549,121.705 62.625,121.705 ; 62.549,121.731 62.625,121.731 ; 62.549,121.756 62.625,121.756 ; 62.549,121.781 62.625,121.781 ; 62.549,121.807 62.625,121.807 ; 62.549,121.832 62.625,121.832 ; 62.549,121.858 62.625,121.858 ; 62.549,121.883 62.625,121.883 ; 62.549,121.908 62.625,121.908 ; 62.549,121.934 62.625,121.934
  Top Layer w0.254: 29.896,127.686 29.896,128.194 ; 31.42,127.433 29.896,127.94 ; 31.419,128.449 29.896,127.94 ; 48.667,65.67 48.667,70.308 49.403,71.044 ; 49.467,65.67 49.467,68.568 51.943,71.044 ; v1(51.918,68.402) 52.121,68.402 53.467,67.056 53.467,65.67 ; 51.943,73.584 51.943,74.32 52.984,75.362 54.889,75.362 55.829,74.422 55.829,69.698 55.093,68.961 55.093,65.696 55.067,65.67 ; 54.267,65.67 54.267,68.72 53.289,69.698 53.289,72.39 54.483,73.584 ; 73.447,127.972 29.896,127.94 ; v1(75.032,62.713) 77.826,65.507 89.586,65.507 91.275,67.196 91.275,69.254 ; 77.064,74.244 77.521,74.244 ; v1(77.521,62.687) 79.731,64.897 90.094,64.897 92.075,66.878 92.075,69.254 ; 78.283,80.442 80.289,80.442 ; v1(80.035,62.687) 81.585,64.237 90.297,64.237 92.888,66.827 92.888,68.885 92.875,68.898 92.875,69.254 ; 80.899,72.415 80.899,70.231 80.924,70.206 ; v1(82.144,62.687) 83.033,63.576 90.729,63.576 93.675,66.522 93.675,69.254 ; v1@86.379,109.042 86.379,106.102 88.214,104.267 90.514,104.267 90.602,104.355 92.38,104.355 94.158,104.355 96.61,104.355 96.749,104.216 ; 86.45,78.079 94.006,78.079 v2(94.082,78.003) ; 88.24,94.64 88.265,94.666 91.059,94.666 ; v1@88.335,99.39 88.335,99.041 90.424,96.952 92.341,96.952 94.031,95.262 95.32,93.973 95.32,90.763 ; 88.748,92.304 88.748,92.024 91.709,89.063 93.12,89.063 ; 88.824,43.064 88.824,47.702 89.56,48.438 ; 89.624,43.064 89.624,45.962 92.1,48.438 ; 90.51,127.984 134.061,128.016 ; 90.602,102.655 92.38,102.655 94.158,102.655 ; v1@91.44,71.984 91.084,71.984 91.161,71.907 v1(91.516,71.907) 92.552,70.871 97.7,70.871 ; v2(91.542,85.623) 91.542,87.147 91.957,87.563 93.12,87.563 ; v1@91.979,109.042 91.993,109.056 95.174,109.056 95.162,109.044 95.162,107.112 ; v1(92.075,45.796) 92.278,45.796 93.624,44.45 93.624,43.064 ; 92.1,50.978 92.1,51.714 93.142,52.756 95.047,52.756 95.987,51.816 95.987,47.092 95.25,46.355 95.25,43.09 95.224,43.064 ; 92.634,115.898 92.634,120.978 97.714,120.978 97.714,115.898 100.584,113.028 100.584,109.398 100.584,108.052 99.67,107.137 96.887,107.137 96.862,107.112 ; 93.12,88.063 94.52,88.063 ; 93.12,89.563 94.42,89.563 94.72,89.263 ; v2(93.142,84.658) 93.472,84.658 94.32,85.506 94.32,86.363 ; 93.675,80.504 93.751,80.581 93.751,83.49 94.82,84.558 94.82,86.363 ; v1@93.935,99.39 96.583,99.39 96.698,99.275 96.749,99.326 96.749,101.93 ; 94.424,43.064 94.424,46.114 93.447,47.092 93.447,49.784 94.64,50.978 ; 94.475,80.504 94.475,82.41 v2(95.047,82.982) ; 95.174,110.756 95.174,118.438 ; 95.32,86.363 95.32,84.487 96.075,83.732 96.075,80.504 ; 95.82,90.763 95.82,93.59 96.946,94.717 96.946,97.327 96.698,97.575 ; 96.32,86.363 96.32,85.189 96.723,84.785 97.702,84.785 ; 97.52,87.563 99.559,87.563 101.295,85.827 101.295,81.178 98.996,78.879 97.7,78.879 ; 97.52,88.063 99.719,88.063 102.337,85.446 v1(102.337,80.62) ; 97.52,88.563 100.032,88.563 102.565,86.03 104.399,86.03 104.402,86.033 104.424,86.055 107.696,86.055 ; 97.52,89.563 99.334,89.563 100.136,90.365 103.58,90.365 104.402,91.187 107.644,91.187 107.696,91.135 ; v1(98.436,80.565) 99.847,81.977 99.847,82.804 99.847,84.34 99.402,84.785 ; 99.111,97.575 101.713,97.575 102.514,96.774 102.514,94.748 v1@102.546,94.717 ; 99.111,99.275 104.775,99.275 ; 99.136,72.265 99.57,71.831 100.635,71.831 ; 100.203,78.079 100.559,78.435 ; 102.921,69.393 102.997,69.469 ; 104.402,87.733 104.402,89.487 ; 105.562,69.418 105.562,64.694 106.172,64.084 109.144,64.084 110.033,64.973 110.033,69.444 ; 132.538,127.507 134.061,128.016 ; 132.537,128.523 134.061,128.016 ; 134.061,127.762 134.061,128.27
  Top Layer w0.305: v3(88.976,88.24) 89.002,88.24 89.325,88.563 93.12,88.563 ; 94.32,90.763 91.738,90.763 91.059,91.442 v6(91.059,92.38) 94.285,92.38 94.82,91.845 94.82,90.763 ; 95.82,86.363 95.82,84.8 97.561,83.058 v3(97.561,82.804) ; 96.32,90.763 96.32,91.595 96.723,91.999 97.79,91.999 v2(98.171,91.618) ; 97.52,89.063 101.027,89.063 v3(101.067,89.103)
  Top Layer w0.508: 35.611,63.997 35.634,64.02 46.217,64.02 ; 35.611,66.537 35.981,66.167 47.867,66.167 47.867,65.67 ; 38.379,48.692 40.792,48.692 ; 43.383,61.519 43.713,61.519 45.212,60.02 46.217,60.02 48.463,60.02 v1(49.682,61.239) ; 43.396,59.22 46.217,59.22 ; 43.917,44.018 43.917,45.161 51.067,52.311 51.067,54.37 ; 46.457,44.018 46.457,46.05 51.867,51.46 51.867,54.37 ; 52.667,54.37 52.667,52.286 53.873,51.079 52.299,49.505 52.299,45.796 54.077,44.018 ; v1(53.035,61.163) 53.378,60.82 57.517,60.82 ; 53.873,48.793 53.975,48.793 56.286,51.105 58.572,48.819 58.75,48.819 61.189,48.819 ; v1(54.508,56.794) 54.534,56.82 57.517,56.82 ; 55.867,54.37 55.867,53.175 56.54,52.502 62.205,52.502 63.602,51.105 ; 57.517,56.02 64.731,56.02 66.091,54.661 66.091,51.156 66.04,51.105 ; 57.517,60.02 59.284,60.02 v1(60.96,58.344) ; 57.517,61.62 60.681,61.62 60.935,61.366 60.935,60.579 61.976,59.538 62.388,59.538 62.401,59.55 66.865,59.55 66.929,59.487 ; 57.517,62.42 59.042,62.42 60.884,64.262 60.884,64.567 61.925,65.608 65.888,65.608 66.929,64.567 ; 62.484,43.477 62.382,43.579 62.382,47.168 63.602,48.387 63.602,48.819 ; 65.176,43.459 65.176,47.955 66.04,48.819 ; v1(73.762,66.269) 73.762,78.207 75.997,80.442 ; 75.768,41.391 75.791,41.414 86.374,41.414 ; 75.768,43.931 76.138,43.561 88.024,43.561 88.024,43.064 ; 77.064,69.164 77.521,68.707 82.296,68.707 83.21,69.621 83.21,70.206 83.884,70.879 86.45,70.879 ; 77.064,74.244 77.572,73.736 82.474,73.736 83.185,73.025 83.185,72.415 83.921,71.679 86.45,71.679 ; 78.283,84.226 78.791,84.226 82.575,80.442 84.303,82.169 90.475,82.169 91.275,81.369 91.275,80.504 ; 78.283,91.846 78.791,91.846 81.153,89.484 81.153,84.974 83.104,83.023 91.145,83.023 92.075,82.093 92.075,80.504 ; 78.283,94.386 78.765,94.386 82.525,90.627 82.525,85.852 84.176,84.201 91.567,84.201 92.875,82.893 92.875,80.504 ; 78.537,26.086 80.95,26.086 ; 78.664,86.766 78.283,86.766 78.208,86.766 75.997,84.556 75.997,80.442 ; 80.95,75.006 83.185,75.006 84.912,73.279 86.45,73.279 89.611,73.279 v1(89.662,73.228) 88.913,72.479 86.45,72.479 ; 83.185,67.234 89.738,67.234 90.475,67.971 90.475,69.254 ; 83.541,38.913 83.871,38.913 85.369,37.414 86.374,37.414 88.621,37.414 v1(89.84,38.633) ; 83.553,36.614 86.374,36.614 ; 84.074,21.412 84.074,22.555 91.224,29.705 91.224,31.764 ; v5(84.15,79.07) 84.341,78.879 86.45,78.879 ; 86.45,74.079 86.45,74.879 85.526,74.879 cw(c85.526,75.856) 84.836,75.165 84.836,76.965 ccw(c84.047,76.176) 84.047,77.292 83.185,77.292 83.185,77.876 82.144,78.918 77.396,78.918 75.997,80.317 75.997,80.442 ; 86.614,21.412 86.614,23.444 92.024,28.854 92.024,31.764 ; 92.824,31.764 92.824,29.68 94.031,28.473 92.456,26.899 92.456,23.19 94.234,21.412 ; v1(93.193,38.557) 93.536,38.214 97.674,38.214 ; 93.853,61.392 94.475,62.014 94.475,69.254 ; 94.031,26.187 94.132,26.187 96.444,28.499 98.73,26.213 98.908,26.213 101.346,26.213 ; 94.52,88.063 94.72,87.863 ; v1(94.539,76.149) 95.809,74.879 97.7,74.879 98.622,74.879 99.136,74.365 99.136,72.265 ; v1(94.666,34.188) 94.692,34.214 97.674,34.214 ; 95.275,69.254 95.275,65.939 v1(96.444,64.77) ; 96.024,31.764 96.024,30.569 96.698,29.896 102.362,29.896 103.759,28.499 ; 96.075,69.254 96.075,67.958 v1(99.187,64.846) ; 97.674,33.414 104.889,33.414 106.248,32.055 106.248,28.55 106.197,28.499 ; 97.674,37.414 99.441,37.414 v1(101.117,35.738) ; 97.674,39.014 100.838,39.014 101.092,38.76 101.092,37.973 102.133,36.932 102.545,36.932 102.558,36.944 107.023,36.944 107.086,36.881 ; 97.674,39.814 99.199,39.814 101.041,41.656 101.041,41.961 102.083,43.002 106.045,43.002 107.086,41.961 ; 97.7,76.479 97.7,75.679 99.073,75.679 100.635,74.117 102.997,74.117 104.419,74.117 108.28,77.978 v1(108.28,78.414) ; 97.7,77.279 99.581,77.279 100.584,76.276 ; 97.7,78.079 100.203,78.079 ; 100.635,69.393 100.635,71.831 ; 102.641,20.871 102.54,20.973 102.54,24.562 103.759,25.781 103.759,26.213 ; 102.845,78.435 110.007,85.598 110.007,102.514 103.124,109.398 ; 102.87,76.276 103.048,76.276 105.512,78.74 105.512,79.654 111.201,85.344 111.201,107.239 109.169,109.271 ; 102.997,69.469 102.997,71.831 ; v1(104.648,94.539) 104.775,94.666 104.775,97.575 ; 105.334,20.853 105.334,25.349 106.197,26.213 ; v1(107.772,66.319) 107.848,66.396 107.848,69.418 108.28,69.85 108.28,72.614
  Top Layer w0.762: 35.179,42.744 33.68,44.242 33.68,47.041 35.331,48.692 36.093,48.692 36.093,48.946 38.379,51.232 38.43,51.283 v4(38.43,54.936) ; v1(38.43,60.736) 39.933,59.233 43.383,59.233 43.396,59.22 ; 75.336,20.138 73.838,21.636 73.838,24.435 75.489,26.086 76.251,26.086 76.251,26.34 78.537,28.626 78.588,28.677 v4(78.588,32.33) ; v1(78.588,38.13) 80.091,36.627 83.541,36.627 83.553,36.614
  Top Layer w1.016: 40.73,54.936 40.73,51.269 v1(40.792,51.206) ; 80.888,32.33 80.888,28.663 v1(80.95,28.6) ; 96.393,61.392 97.003,62.001 109.271,62.001 112.319,65.049 112.319,69.444 112.319,70.231 110.58,71.97 110.58,72.614
  Bottom Layer w0.254: 49.403,73.584 49.403,73.508 50.698,72.212 50.698,69.621 v1(51.918,68.402) ; 80.315,80.416 80.315,77.902 80.95,77.267 ; 83.972,89.306 84.379,88.9 ; v5(84.15,79.07) 84.379,79.299 84.379,84.811 ; 89.56,50.978 89.56,50.902 90.856,49.606 90.856,47.015 v1(92.075,45.796) ; 91.313,61.392 91.313,63.271 92.812,64.77 v1(96.444,64.77) ; v1(91.516,71.907) v2@91.516,85.598 ; v2(93.142,84.658) 94.818,82.982 v2(95.047,82.982) ; v2(94.082,78.003) 99.72,78.003 v1(102.337,80.62)
  Bottom Layer w0.508: 54.483,71.044 54.483,56.82 v1(54.508,56.794) ; v1(73.762,66.269) 73.787,66.243 107.696,66.243 v1(107.772,66.319) ; 78.283,86.766 78.664,86.766 82.829,90.932 86.284,90.932 v3(88.976,88.24) 89.205,88.24 91.059,90.094 v6(91.059,92.38) ; v2@91.516,85.598 v2(91.542,85.623) ; 94.64,48.438 94.64,34.214 v1(94.666,34.188) ; v3(97.561,82.804) 107.112,82.804 108.28,81.636 v1(108.28,78.414) 109.783,78.414 111.404,80.035 111.404,92.862 109.728,94.539 v1(104.648,94.539) ; v2(98.171,91.618) 99.847,93.294 103.048,93.294 104.292,94.539 v1(104.648,94.539) ; v3(101.067,89.103) 102.311,89.103 104.648,91.44 v1(104.648,94.539)
  Bottom Layer w0.762: v1(38.43,60.736) 38.43,69.215 40.259,71.044 46.863,71.044 ; 51.537,44.018 51.537,51.105 49.53,53.111 39.827,53.111 38.43,54.508 v4(38.43,54.936) 58.932,54.936 v1(59.563,54.305) ; v1(58.75,51.105) 58.699,51.156 58.699,53.238 59.563,54.102 v1(59.563,54.305) ; v1(60.96,58.344) 60.96,58.09 59.563,56.693 v1(59.563,54.305) ; v1(61.189,51.105) 61.239,51.156 61.239,53.188 60.122,54.305 v1(59.563,54.305) ; v1(78.588,38.13) 78.588,46.609 80.416,48.438 87.02,48.438 ; 91.694,21.412 91.694,28.499 89.687,30.505 79.985,30.505 78.588,31.902 v4(78.588,32.33) 99.09,32.33 v1(99.72,31.699) ; v1(98.908,28.499) 98.857,28.55 98.857,30.632 99.72,31.496 v1(99.72,31.699) ; v1(101.117,35.738) 101.117,35.484 99.72,34.087 v1(99.72,31.699) ; v1(101.346,28.499) 101.397,28.55 101.397,30.582 100.279,31.699 v1(99.72,31.699)
  Bottom Layer w1.016: 39.091,45.284 39.137,45.284 40.818,46.965 40.818,51.181 v1(40.792,51.206) ; 79.248,22.678 79.294,22.678 80.975,24.359 80.975,28.575 v1(80.95,28.6)
  other v1: 89.967,35.306 93.269,35.357 49.809,57.912 53.111,57.963 94.64,73.406 89.713,76.225 96.952,94.818 102.489,94.894 88.367,99.314 93.904,99.314 86.309,109.017 92.024,109.195

## Polygon pours and split planes (outlines as drawn)
no net on Top Layer "Top Layer-No Net" (solid, remove dead copper, pour order 4): 110.439,16.84 110.439,53.67 72.339,53.67 72.339,16.789 72.39,16.84 88.087,16.84 88.087,16.967 cw(c89.23,16.967) 89.23,18.11 94.564,18.11 94.844,18.085 95.428,17.805 95.783,17.272 95.834,16.713 110.312,16.713
no net on Top Layer "Top Layer-No Net" (solid, remove dead copper, pour order 8): 111.536,55.565 113.665,57.694 113.665,122.276 111.125,124.816 74.295,124.816 71.755,122.276 71.755,57.846 74.036,55.565 86.395,55.565 87.274,56.444 97.615,56.444 97.636,56.465 98.536,55.565 111.536,55.565
no net on Top Layer "Top Layer-No Net" (solid, remove dead copper, pour order 4): 70.282,39.446 70.282,76.276 32.182,76.276 32.182,39.395 32.233,39.446 47.93,39.446 47.93,39.573 cw(c49.073,39.573) 49.073,40.716 54.407,40.716 54.686,40.691 55.27,40.411 55.626,39.878 55.677,39.319 70.155,39.319
GND on Top Layer "Top Layer-No Net" (solid, remove dead copper, pour order 15): 64.618,124.765 64.592,124.79 32.283,124.79 32.258,124.765 32.258,77.775 64.694,77.775 64.643,77.826 64.643,124.765
no net on Bottom Layer "Top Layer-No Net" (solid, remove dead copper, pour order 6): 110.439,16.84 110.439,53.67 72.339,53.67 72.339,16.789 88.087,16.84 88.087,16.967 cw(c89.23,16.967) 89.23,18.11 94.564,18.11 95.428,17.856 95.809,17.221 95.834,16.713 110.312,16.713
no net on Bottom Layer "Top Layer-No Net" (solid, remove dead copper, pour order 6): 113.665,57.694 113.584,57.694 111.455,55.565 98.536,55.565 98.476,55.625 97.636,56.465 87.295,56.465 87.235,56.465 86.335,55.565 74.036,55.565 71.755,57.846 71.755,122.276 71.907,122.428 74.295,124.816 74.397,124.714 74.498,124.714 111.227,124.714 113.665,122.276 113.665,57.694
no net on Bottom Layer "Top Layer-No Net" (solid, remove dead copper, pour order 6): 70.282,39.446 70.282,76.276 32.182,76.276 32.182,39.395 47.93,39.446 47.93,39.573 cw(c49.073,39.573) 49.073,40.716 54.407,40.716 55.27,40.462 55.651,39.827 55.677,39.319 70.155,39.319
GND on Bottom Layer "Top Layer-No Net" (solid, remove dead copper, pour order 19): 64.618,124.739 64.694,124.663 64.694,77.749 32.309,77.749 32.309,124.79

## Keep-outs
Keep-Out Layer:
  lines w0.1: 30,126 134,126 ; 64.618,124.779 32.272,124.779 32.272,77.775 64.668,77.775 ; 64.657,77.839 64.657,124.829
  lines w0.254: 31.369,125.857 114.706,125.857 114.706,16.525 31.505,16.2 31.496,16.84 31.521,19.177 31.445,126.009 31.471,125.984 ; 31.445,13.233 31.445,13.741 ; 32.969,12.979 31.445,13.487 ; 32.969,13.995 31.445,13.487 ; 47.93,39.446 32.436,39.446 32.182,39.472 32.182,76.276 70.282,76.276 70.282,39.446 cw(c70.155,39.446) 70.155,39.319 55.677,39.319 55.677,39.446 ccw(c54.407,39.446) 54.407,40.716 53.137,40.716 49.454,40.716 49.073,40.716 ccw(c49.073,39.573) 47.93,39.573 ; 65.179,13.487 31.445,13.487 ; 80.973,13.487 114.706,13.487 ; 88.087,16.84 72.593,16.84 72.339,16.866 72.339,53.67 110.439,53.67 110.439,16.84 cw(c110.312,16.84) 110.312,16.713 95.834,16.713 95.834,16.84 ccw(c94.564,16.84) 94.564,18.11 93.294,18.11 89.611,18.11 89.23,18.11 ccw(c89.23,16.967) 88.087,16.967 ; 113.182,12.979 114.706,13.487 ; 113.182,13.995 114.706,13.487 ; 114.706,13.233 114.706,13.741 ; 121.135,123.57 121.641,125.095 ; 121.283,16.89 121.793,15.367 ; 121.387,125.095 121.895,125.095 ; 121.539,15.367 122.047,15.367 ; 121.705,78.89 121.641,125.095 ; 121.729,61.572 121.793,15.367 ; 122.151,123.572 121.641,125.095 ; 122.299,16.892 121.793,15.367 ; 71.755,57.846 71.755,60.046 71.755,122.276 74.295,124.816 84.455,124.816 111.125,124.816 113.665,122.276 113.665,60.046 113.665,57.694 111.536,55.565 98.536,55.565 97.636,56.465 87.295,56.465 86.395,55.565 74.036,55.565 71.755,57.846
  text "109.728 (mm)" at 120.791,78.634 h1.52 r270.08
  text "83.261 (mm)" at 65.433,12.573 h1.52

## Other copper
Top Layer:
  text "104.165 (mm)" at 73.701,127.058 h1.52 r0.04
  text "LAB411-RF315" at 76.302,103.2 h1.52 r90